# Altium PCB STM 32 F4 Robusta V1.PcbDoc (part 7 of 7)
Units mm, origin at the board's own origin, x right, y up, seen from the top; angles counter-clockwise.
Board outline 287.78 x 230 mm, 2 copper layers (Top Layer, Bottom Layer); 54 components, 96 nets, 355 pads, 16 vias.
Unrouted connection lines stored in the file: 3.
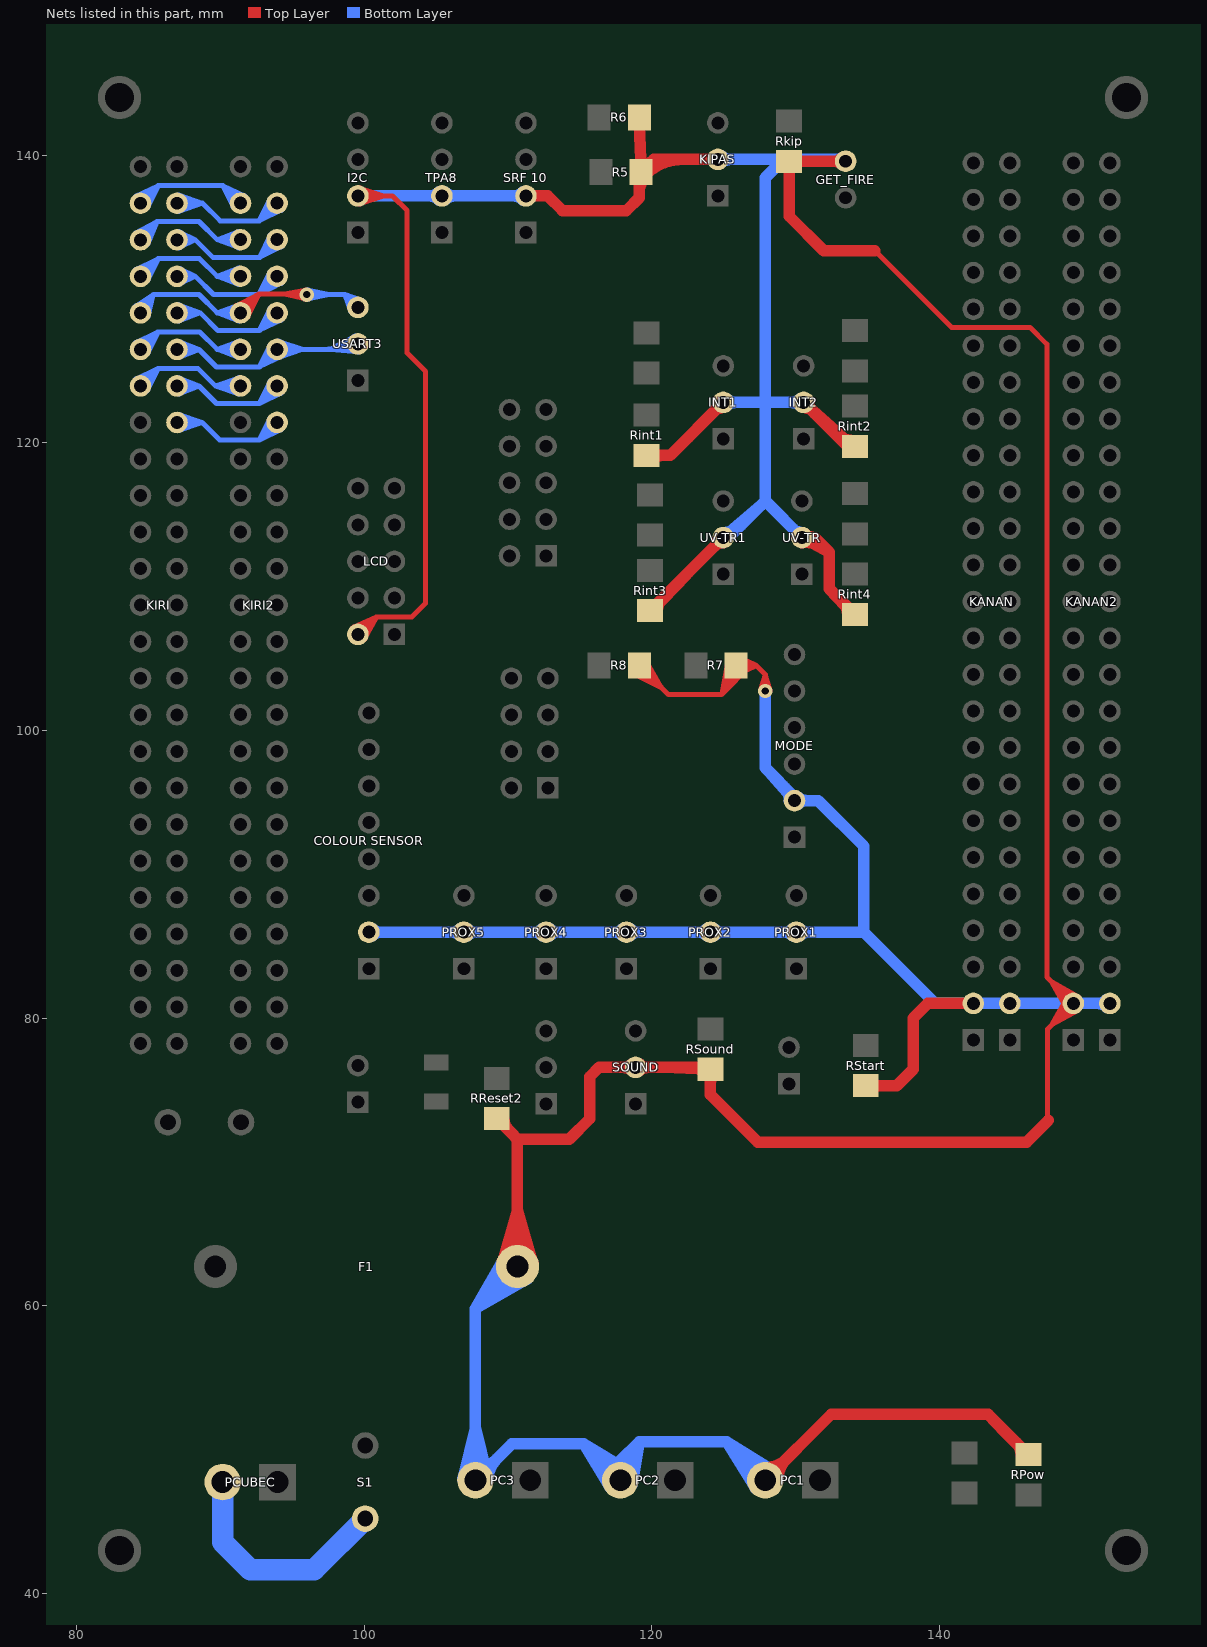
[diagram p7: the nets of this part, all layers, seen from the top]

## Via types
v1: diameter 1, hole 0.5, Top Layer to Bottom Layer, 13 vias
v2: diameter 0.8, hole 0.5, Top Layer to Bottom Layer, 3 vias

## Nets (pads, with @x,y where several pads share a name; then routed paths per layer and width w, separated by ;. In a path a pad name is that pad's centre, name@x,y a point inside that pad or via, vN(x,y) a via of type N, cw(c..) or ccw(c..) an arc to the next point about the centre after c; other vN are vias at no path point) (continued)
NetKIRI2_35: KIRI2.35 KIRI.35 | length 48.6
  Bottom Layer w0.35: KIRI.35@87.03,121.19 88.024,121.459 ; KIRI.35@87.03,121.634 88.024,121.365 ; KIRI.35@87.09,120.845 88.743,121.412 ; KIRI.35@87.09,121.979 88.743,121.412 ; KIRI.35@87.13,120.853 88.024,121.365 ; KIRI.35@87.13,121.971 88.024,121.459 ; KIRI.35@87.181,120.868 88.024,121.459 ; KIRI.35@87.181,121.956 88.024,121.365 ; KIRI.35@87.402,121.005 cw(c88.383,120.024) 88.383,121.412 cw(c88.383,122.8) KIRI.35@87.402,121.819 ; KIRI2.35@93.375,121.417 cw(c91.987,121.417) 92.968,120.435 cw(c93.95,119.454) KIRI2.35@93.95,120.842 ; KIRI2.35@93.434,121.67 93.256,120.656 ; KIRI2.35@93.459,121.717 93.189,120.723 ; KIRI2.35@93.482,121.75 92.725,120.192 ; KIRI2.35@93.768,121.55 93.256,120.656 ; KIRI2.35@94.083,121.235 93.189,120.723 ; KIRI2.35@94.203,120.901 93.189,120.723 ; KIRI2.35@94.25,120.926 93.256,120.656 ; KIRI2.35@94.283,120.949 92.725,120.192 ; KIRI.35@86.995,121.412 88.024,121.459 ; KIRI.35@86.995,121.412 88.024,121.365 ; KIRI.35@86.995,121.412 88.743,121.412 ; 88.024,121.365 87.009,121.187 88.743,121.412 ; 88.024,121.459 87.009,121.637 88.743,121.412 ; 88.743,121.412 89.963,120.192 92.725,120.192 ; 92.725,120.192 KIRI2.35@93.95,121.417 ; 92.725,120.192 93.781,121.565 93.189,120.723 ; 92.725,120.192 94.098,121.248 93.256,120.656 ; 92.725,120.192 KIRI2.35@93.95,121.417 ; 93.189,120.723 KIRI2.35@93.95,121.417 ; 93.256,120.656 KIRI2.35@93.95,121.417
NetKIRI2_37: KIRI2.37 KIRI.37 | length 47.7
  Bottom Layer w0.35: KIRI.37@87.009,123.727 88.024,123.905 ; KIRI.37@87.009,124.177 88.024,123.999 ; KIRI.37@87.012,123.728 88.519,123.952 ; KIRI.37@87.012,124.176 88.519,123.952 ; KIRI.37@87.03,123.73 88.024,123.999 ; KIRI.37@87.03,124.174 88.024,123.905 ; KIRI.37@87.103,123.387 88.519,123.952 ; KIRI.37@87.103,124.517 88.519,123.952 ; KIRI.37@87.13,123.393 88.024,123.905 ; KIRI.37@87.13,124.511 88.024,123.999 ; KIRI.37@87.181,123.408 88.024,123.999 ; KIRI.37@87.181,124.496 88.024,123.905 ; KIRI.37@87.402,123.545 cw(c88.383,122.564) 88.383,123.952 cw(c88.383,125.34) KIRI.37@87.402,124.359 ; KIRI2.37@93.375,123.957 cw(c91.987,123.957) 92.968,122.975 cw(c93.95,121.994) KIRI2.37@93.95,123.382 ; KIRI2.37@93.434,124.21 93.256,123.196 ; KIRI2.37@93.459,124.257 93.189,123.263 ; KIRI2.37@93.482,124.29 92.725,122.732 ; KIRI2.37@93.768,124.09 93.256,123.196 ; KIRI2.37@94.083,123.775 93.189,123.263 ; KIRI2.37@94.203,123.441 93.189,123.263 ; KIRI2.37@94.25,123.466 93.256,123.196 ; KIRI2.37@94.283,123.489 92.725,122.732 ; KIRI.37@86.995,123.952 88.024,123.999 ; KIRI.37@86.995,123.952 88.024,123.905 ; KIRI.37@86.995,123.952 88.519,123.952 ; 88.519,123.952 89.739,122.732 92.725,122.732 ; 92.725,122.732 KIRI2.37@93.95,123.957 ; 92.725,122.732 93.781,124.105 93.189,123.263 ; 92.725,122.732 94.098,123.788 93.256,123.196 ; 92.725,122.732 KIRI2.37@93.95,123.957 ; 93.189,123.263 KIRI2.37@93.95,123.957 ; 93.256,123.196 KIRI2.37@93.95,123.957
NetKIRI2_38: KIRI2.38 KIRI.38 | length 48.6
  Bottom Layer w0.35: KIRI.38@84.122,124.42 85.68,125.177 ; KIRI.38@84.155,124.443 85.149,124.713 ; KIRI.38@84.202,124.468 85.216,124.646 ; KIRI.38@84.322,124.134 85.216,124.646 ; KIRI.38@84.455,124.527 ccw(c84.455,125.915) 85.437,124.934 ccw(c86.418,123.952) KIRI.38@85.03,123.952 ; KIRI.38@84.637,123.819 85.149,124.713 ; KIRI.38@84.923,123.619 85.68,125.177 ; KIRI.38@84.946,123.652 85.216,124.646 ; KIRI.38@84.971,123.699 85.149,124.713 ; KIRI2.38@91.003,123.55 ccw(c90.022,122.569) 90.022,123.957 ccw(c90.022,125.345) KIRI2.38@91.003,124.364 ; KIRI2.38@91.224,123.413 90.381,124.004 ; KIRI2.38@91.224,124.501 90.381,123.91 ; KIRI2.38@91.275,123.398 90.381,123.91 ; KIRI2.38@91.275,124.516 90.381,124.004 ; KIRI2.38@91.316,123.39 89.657,123.957 ; KIRI2.38@91.316,124.524 89.657,123.957 ; KIRI2.38@91.375,123.735 90.381,124.004 ; KIRI2.38@91.375,124.179 90.381,123.91 ; KIRI.38@84.455,123.952 85.216,124.646 ; KIRI.38@84.455,123.952 85.149,124.713 ; KIRI.38@84.455,123.952 85.68,125.177 ; 85.149,124.713 84.306,124.121 85.68,125.177 ; 85.216,124.646 84.624,123.803 85.68,125.177 ; 85.68,125.177 88.437,125.177 89.657,123.957 ; 89.657,123.957 KIRI2.38@91.41,123.957 ; 89.657,123.957 91.396,124.182 90.381,124.004 ; 89.657,123.957 91.396,123.732 90.381,123.91 ; 89.657,123.957 KIRI2.38@91.41,123.957 ; 90.381,123.91 KIRI2.38@91.41,123.957 ; 90.381,124.004 KIRI2.38@91.41,123.957
NetKIRI2_39: KIRI2.39 KIRI.39 USART3.2 | length 99.2
  Bottom Layer w0.35: KIRI.39@87.009,126.267 88.024,126.445 ; KIRI.39@87.009,126.717 88.024,126.539 ; KIRI.39@87.012,126.268 88.519,126.492 ; KIRI.39@87.012,126.716 88.519,126.492 ; KIRI.39@87.03,126.27 88.024,126.539 ; KIRI.39@87.03,126.714 88.024,126.445 ; KIRI.39@87.103,125.927 88.519,126.492 ; KIRI.39@87.103,127.057 88.519,126.492 ; KIRI.39@87.13,125.933 88.024,126.445 ; KIRI.39@87.13,127.051 88.024,126.539 ; KIRI.39@87.181,125.948 88.024,126.539 ; KIRI.39@87.181,127.036 88.024,126.445 ; KIRI.39@87.402,126.085 cw(c88.383,125.104) 88.383,126.492 cw(c88.383,127.88) KIRI.39@87.402,126.899 ; KIRI2.39@93.375,126.497 cw(c91.987,126.497) 92.968,125.515 cw(c93.95,124.534) KIRI2.39@93.95,125.922 ; KIRI2.39@93.434,126.75 93.256,125.736 ; KIRI2.39@93.459,126.797 93.189,125.803 ; KIRI2.39@93.482,126.83 92.725,125.272 ; KIRI2.39@93.768,126.63 93.256,125.736 ; KIRI2.39@93.964,126.272 95.75,126.497 ; KIRI2.39@93.964,126.722 95.75,126.497 ; KIRI2.39@93.964,126.272 94.979,126.45 ; KIRI2.39@93.964,126.722 94.979,126.544 ; KIRI2.39@93.985,126.275 94.979,126.544 ; KIRI2.39@93.985,126.719 94.979,126.45 ; KIRI2.39@94.042,125.929 95.75,126.497 ; KIRI2.39@94.042,127.065 95.75,126.497 ; KIRI2.39@94.083,126.315 93.189,125.803 ; KIRI2.39@94.085,125.938 94.979,126.45 ; KIRI2.39@94.085,127.056 94.979,126.544 ; KIRI2.39@94.136,125.953 94.979,126.544 ; KIRI2.39@94.136,127.041 94.979,126.45 ; KIRI2.39@94.203,125.981 93.189,125.803 ; KIRI2.39@94.25,126.006 93.256,125.736 ; KIRI2.39@94.283,126.029 92.725,125.272 ; KIRI2.39@94.357,126.09 cw(c95.338,125.109) 95.338,126.497 cw(c95.338,127.885) KIRI2.39@94.357,126.904 ; 97.272,126.497 ccw(c97.272,129.169) USART3.2@99.161,127.28 ; 98.117,126.497 ccw(c98.117,128.324) USART3.2@99.409,127.032 ; USART3.2@99.192,126.497 KIRI2.39@93.95,126.497 ; USART3.2@99.246,127.349 98.59,126.559 ; USART3.2@99.369,127.413 97.964,126.588 ; USART3.2@99.376,127.415 97.646,126.497 ; USART3.2@99.476,127.078 98.59,126.559 ; USART3.2@99.512,127.091 97.646,126.497 ; USART3.2@99.513,127.091 97.964,126.588 ; USART3.2@99.567,126.298 97.964,126.588 ; USART3.2@99.583,126.298 98.59,126.559 ; USART3.2@99.592,126.649 97.964,126.588 ; USART3.2@99.594,126.299 97.646,126.497 ; USART3.2@99.598,126.65 97.646,126.497 ; USART3.2@99.613,126.653 98.59,126.559 ; KIRI.39@86.995,126.492 88.024,126.445 ; KIRI.39@86.995,126.492 88.024,126.539 ; KIRI.39@86.995,126.492 88.519,126.492 ; 88.519,126.492 89.739,125.272 92.725,125.272 ; 92.725,125.272 KIRI2.39@93.95,126.497 ; 92.725,125.272 93.781,126.645 93.189,125.803 ; 92.725,125.272 94.098,126.328 93.256,125.736 ; 92.725,125.272 KIRI2.39@93.95,126.497 ; 93.189,125.803 KIRI2.39@93.95,126.497 ; 93.256,125.736 KIRI2.39@93.95,126.497 ; KIRI2.39@93.95,126.497 94.979,126.45 ; KIRI2.39@93.95,126.497 94.979,126.544 ; 97.646,126.497 USART3.2@99.568,126.873 ; 97.964,126.588 USART3.2@99.568,126.873 ; 98.59,126.559 USART3.2@99.568,126.873
NetKIRI2_40: KIRI2.40 KIRI.40 | length 48
  Bottom Layer w0.35: KIRI.40@84.122,126.96 85.68,127.717 ; KIRI.40@84.155,126.983 85.149,127.253 ; KIRI.40@84.202,127.008 85.216,127.186 ; KIRI.40@84.322,126.674 85.216,127.186 ; KIRI.40@84.455,127.067 ccw(c84.455,128.455) 85.437,127.474 ccw(c86.418,126.492) KIRI.40@85.03,126.492 ; KIRI.40@84.637,126.359 85.149,127.253 ; KIRI.40@84.923,126.159 85.68,127.717 ; KIRI.40@84.946,126.192 85.216,127.186 ; KIRI.40@84.971,126.239 85.149,127.253 ; KIRI2.40@91.003,126.09 ccw(c90.022,125.109) 90.022,126.497 ccw(c90.022,127.885) KIRI2.40@91.003,126.904 ; KIRI2.40@91.224,125.953 90.381,126.544 ; KIRI2.40@91.224,127.041 90.381,126.45 ; KIRI2.40@91.275,125.938 90.381,126.45 ; KIRI2.40@91.275,127.056 90.381,126.544 ; KIRI2.40@91.308,125.931 89.784,126.497 ; KIRI2.40@91.308,127.063 89.784,126.497 ; KIRI2.40@91.375,126.275 90.381,126.544 ; KIRI2.40@91.375,126.719 90.381,126.45 ; KIRI2.40@91.394,126.273 89.784,126.497 ; KIRI2.40@91.394,126.721 89.784,126.497 ; KIRI2.40@91.396,126.272 90.381,126.45 ; KIRI2.40@91.396,126.722 90.381,126.544 ; KIRI.40@84.455,126.492 85.149,127.253 ; KIRI.40@84.455,126.492 85.216,127.186 ; KIRI.40@84.455,126.492 85.68,127.717 ; 85.149,127.253 84.306,126.661 85.68,127.717 ; 85.216,127.186 84.624,126.343 85.68,127.717 ; 85.68,127.717 88.564,127.717 89.784,126.497 ; 89.784,126.497 KIRI2.40@91.41,126.497 ; 89.784,126.497 KIRI2.40@91.41,126.497 ; 90.381,126.45 KIRI2.40@91.41,126.497 ; 90.381,126.544 KIRI2.40@91.41,126.497
NetKIRI2_41: KIRI2.41 KIRI.41 | length 48.1
  Bottom Layer w0.35: KIRI.41@87.009,128.807 88.024,128.985 ; KIRI.41@87.009,129.257 88.024,129.079 ; KIRI.41@87.011,128.808 88.616,129.032 ; KIRI.41@87.011,129.256 88.616,129.032 ; KIRI.41@87.03,128.81 88.024,129.079 ; KIRI.41@87.03,129.254 88.024,128.985 ; KIRI.41@87.097,128.466 88.616,129.032 ; KIRI.41@87.097,129.598 88.616,129.032 ; KIRI.41@87.13,128.473 88.024,128.985 ; KIRI.41@87.13,129.591 88.024,129.079 ; KIRI.41@87.181,128.488 88.024,129.079 ; KIRI.41@87.181,129.576 88.024,128.985 ; KIRI.41@87.402,128.625 cw(c88.383,127.644) 88.383,129.032 cw(c88.383,130.42) KIRI.41@87.402,129.439 ; KIRI2.41@93.375,129.037 cw(c91.987,129.037) 92.968,128.055 cw(c93.95,127.074) KIRI2.41@93.95,128.462 ; KIRI2.41@93.434,129.29 93.256,128.276 ; KIRI2.41@93.459,129.337 93.189,128.343 ; KIRI2.41@93.482,129.37 92.725,127.812 ; KIRI2.41@93.768,129.17 93.256,128.276 ; KIRI2.41@94.083,128.855 93.189,128.343 ; KIRI2.41@94.203,128.521 93.189,128.343 ; KIRI2.41@94.25,128.546 93.256,128.276 ; KIRI2.41@94.283,128.569 92.725,127.812 ; KIRI.41@86.995,129.032 88.024,129.079 ; KIRI.41@86.995,129.032 88.024,128.985 ; KIRI.41@86.995,129.032 88.616,129.032 ; 88.616,129.032 89.836,127.812 92.725,127.812 ; 92.725,127.812 KIRI2.41@93.95,129.037 ; 92.725,127.812 93.781,129.185 93.189,128.343 ; 92.725,127.812 94.098,128.868 93.256,128.276 ; 92.725,127.812 KIRI2.41@93.95,129.037 ; 93.189,128.343 KIRI2.41@93.95,129.037 ; 93.256,128.276 KIRI2.41@93.95,129.037
NetKIRI2_42: KIRI2.42 KIRI.42 USART3.3 | length 96.6
  Top Layer w0.35: KIRI2.42@91.071,129.502 92.725,130.352 ; KIRI2.42@91.11,129.528 92.104,129.798 ; KIRI2.42@91.156,129.553 92.171,129.731 ; KIRI2.42@91.277,129.219 92.171,129.731 ; KIRI2.42@91.41,129.612 ccw(c91.41,131) 92.392,130.019 ccw(c93.373,129.037) KIRI2.42@91.985,129.037 ; KIRI2.42@91.578,128.888 92.725,130.352 ; KIRI2.42@91.579,128.888 92.171,129.731 ; KIRI2.42@91.592,128.904 92.104,129.798 ; KIRI2.42@91.875,128.698 92.725,130.352 ; KIRI2.42@91.901,128.737 92.171,129.731 ; KIRI2.42@91.926,128.783 92.104,129.798 ; 95.107,130.352 cw(c95.107,129.397) v1@95.782,130.072 ; 95.348,130.352 ccw(c95.348,130.966) v1@95.782,130.532 ; v1@95.708,130.352 92.725,130.352 ; v1@95.867,130.011 95.507,130.373 ; v1@95.923,129.989 95.354,130.319 ; v1@95.94,130.619 95.354,130.319 ; v1@95.952,130.621 95.507,130.373 ; v1@95.968,129.98 94.457,130.352 ; v1@95.988,130.626 94.457,130.352 ; KIRI2.42@91.41,129.037 92.104,129.798 ; KIRI2.42@91.41,129.037 92.171,129.731 ; KIRI2.42@91.41,129.037 92.725,130.352 ; 92.104,129.798 91.261,129.206 92.725,130.352 ; 94.457,130.352 v1(96.012,130.302) ; 95.354,130.319 v1(96.012,130.302) ; 95.507,130.373 v1(96.012,130.302)
  Bottom Layer w0.35: KIRI.42@84.053,129.443 85.344,130.302 ; KIRI.42@84.124,129.502 85.039,129.795 ; KIRI.42@84.281,129.174 85.344,130.302 ; KIRI.42@84.294,129.189 85.039,129.795 ; KIRI.42@84.455,129.607 ccw(c84.455,130.075) 84.786,129.744 ; KIRI.42@84.648,128.917 85.344,130.302 ; KIRI.42@84.648,128.917 85.039,129.795 ; KIRI.42@84.674,129.082 cw(c85.484,129.268) 84.897,129.855 ; KIRI.42@84.979,128.795 85.344,130.302 ; KIRI.42@84.995,128.835 85.039,129.795 ; KIRI.42@85.015,129.16 cw(c86.212,129.434) 85.344,130.302 ; KIRI2.42@91.003,128.63 ccw(c90.022,127.649) 90.022,129.037 ccw(c90.022,130.425) KIRI2.42@91.003,129.444 ; KIRI2.42@91.224,128.493 90.381,129.084 ; KIRI2.42@91.224,129.581 90.381,128.99 ; KIRI2.42@91.275,128.478 90.381,128.99 ; KIRI2.42@91.275,129.596 90.381,129.084 ; KIRI2.42@91.308,128.471 89.784,129.037 ; KIRI2.42@91.308,129.603 89.784,129.037 ; KIRI2.42@91.375,128.815 90.381,129.084 ; KIRI2.42@91.375,129.259 90.381,128.99 ; KIRI2.42@91.394,128.813 89.784,129.037 ; KIRI2.42@91.394,129.261 89.784,129.037 ; KIRI2.42@91.396,128.812 90.381,128.99 ; KIRI2.42@91.396,129.262 90.381,129.084 ; v1@96.046,129.979 97.562,130.302 v1@96.046,130.625 ; v1@96.088,129.986 96.594,130.275 ; v1@96.088,130.618 96.594,130.329 ; v1@96.117,129.994 96.594,130.329 ; v1@96.117,130.61 96.594,130.275 ; v1@96.242,130.072 cw(c96.797,129.517) 96.797,130.302 cw(c96.797,131.087) v1@96.242,130.532 ; USART3.3@98.995,129.455 ccw(c97.911,129.533) 98.679,130.302 ; USART3.3@99.079,129.11 98.679,130.302 ; USART3.3@99.395,129.269 98.679,130.302 ; USART3.3@99.526,129.986 cw(c99.448,131.07) 98.679,130.302 ; USART3.3@99.568,129.413 98.679,130.302 ; USART3.3@99.712,129.586 98.679,130.302 ; USART3.3@99.871,129.902 98.679,130.302 ; KIRI.42@84.455,129.032 85.039,129.795 ; KIRI.42@84.455,129.032 85.344,130.302 ; KIRI.42@84.455,129.032 84.455,129.413 85.344,130.302 ; 85.344,130.302 88.519,130.302 89.784,129.037 ; 89.784,129.037 KIRI2.42@91.41,129.037 ; 89.784,129.037 KIRI2.42@91.41,129.037 ; 90.381,128.99 KIRI2.42@91.41,129.037 ; 90.381,129.084 KIRI2.42@91.41,129.037 ; v1(96.012,130.302) 96.594,130.275 ; v1(96.012,130.302) 96.594,130.329 ; v1(96.012,130.302) 98.679,130.302
NetKIRI2_43: KIRI2.43 KIRI.43 | length 45.6
  Bottom Layer w0.35: KIRI.43@87.008,131.347 87.907,131.513 ; KIRI.43@87.008,131.797 87.907,131.631 ; KIRI.43@87.015,131.348 88.265,131.572 ; KIRI.43@87.015,131.796 88.265,131.572 ; KIRI.43@87.037,131.351 87.907,131.631 ; KIRI.43@87.037,131.793 87.907,131.513 ; KIRI.43@87.125,131.012 88.265,131.572 ; KIRI.43@87.125,132.132 88.265,131.572 ; KIRI.43@87.14,131.016 87.907,131.513 ; KIRI.43@87.14,132.128 87.907,131.631 ; KIRI.43@87.211,131.039 87.907,131.631 ; KIRI.43@87.211,132.105 87.907,131.513 ; KIRI.43@87.427,131.193 cw(c88.265,130.457) 88.265,131.572 ; KIRI.43@87.427,131.951 ccw(c88.265,132.687) 88.265,131.572 ; KIRI2.43@93.375,131.577 cw(c91.987,131.577) 92.968,130.595 cw(c93.95,129.614) KIRI2.43@93.95,131.002 ; KIRI2.43@93.434,131.83 93.256,130.816 ; KIRI2.43@93.459,131.877 93.189,130.883 ; KIRI2.43@93.484,131.914 92.675,130.302 ; KIRI2.43@93.768,131.71 93.256,130.816 ; KIRI2.43@93.781,131.726 93.189,130.883 ; KIRI2.43@93.781,131.726 92.675,130.302 ; KIRI2.43@94.083,131.395 93.189,130.883 ; KIRI2.43@94.099,131.408 93.256,130.816 ; KIRI2.43@94.099,131.408 92.675,130.302 ; KIRI2.43@94.203,131.061 93.189,130.883 ; KIRI2.43@94.25,131.086 93.256,130.816 ; KIRI2.43@94.287,131.111 92.675,130.302 ; KIRI.43@86.995,131.572 87.907,131.631 ; KIRI.43@86.995,131.572 87.907,131.513 ; KIRI.43@86.995,131.572 88.265,131.572 ; 88.265,131.572 89.535,130.302 92.675,130.302 ; 92.675,130.302 KIRI2.43@93.95,131.577 ; 92.675,130.302 KIRI2.43@93.95,131.577 ; 93.189,130.883 KIRI2.43@93.95,131.577 ; 93.256,130.816 KIRI2.43@93.95,131.577
NetKIRI2_44: KIRI2.44 KIRI.44 | length 48
  Bottom Layer w0.35: KIRI.44@84.122,132.04 85.68,132.797 ; KIRI.44@84.155,132.063 85.149,132.333 ; KIRI.44@84.202,132.088 85.216,132.266 ; KIRI.44@84.322,131.754 85.216,132.266 ; KIRI.44@84.455,132.147 ccw(c84.455,133.535) 85.437,132.554 ccw(c86.418,131.572) KIRI.44@85.03,131.572 ; KIRI.44@84.637,131.439 85.149,132.333 ; KIRI.44@84.923,131.239 85.68,132.797 ; KIRI.44@84.946,131.272 85.216,132.266 ; KIRI.44@84.971,131.319 85.149,132.333 ; KIRI2.44@91.003,131.17 ccw(c90.022,130.189) 90.022,131.577 ccw(c90.022,132.965) KIRI2.44@91.003,131.984 ; KIRI2.44@91.224,131.033 90.381,131.624 ; KIRI2.44@91.224,132.121 90.381,131.53 ; KIRI2.44@91.275,131.018 90.381,131.53 ; KIRI2.44@91.275,132.136 90.381,131.624 ; KIRI2.44@91.308,131.011 89.784,131.577 ; KIRI2.44@91.308,132.143 89.784,131.577 ; KIRI2.44@91.375,131.355 90.381,131.624 ; KIRI2.44@91.375,131.799 90.381,131.53 ; KIRI2.44@91.394,131.353 89.784,131.577 ; KIRI2.44@91.394,131.801 89.784,131.577 ; KIRI2.44@91.396,131.352 90.381,131.53 ; KIRI2.44@91.396,131.802 90.381,131.624 ; KIRI.44@84.455,131.572 85.149,132.333 ; KIRI.44@84.455,131.572 85.216,132.266 ; KIRI.44@84.455,131.572 85.68,132.797 ; 85.149,132.333 84.306,131.741 85.68,132.797 ; 85.216,132.266 84.624,131.423 85.68,132.797 ; 85.68,132.797 88.564,132.797 89.784,131.577 ; 89.784,131.577 KIRI2.44@91.41,131.577 ; 89.784,131.577 KIRI2.44@91.41,131.577 ; 90.381,131.53 KIRI2.44@91.41,131.577 ; 90.381,131.624 KIRI2.44@91.41,131.577
NetKIRI2_45: KIRI2.45 KIRI.45 | length 40.1
  Bottom Layer w0.35: KIRI.45@87.008,133.887 87.907,134.053 ; KIRI.45@87.008,134.337 87.907,134.171 ; KIRI.45@87.015,133.888 88.265,134.112 ; KIRI.45@87.015,134.336 88.265,134.112 ; KIRI.45@87.037,133.891 87.907,134.171 ; KIRI.45@87.037,134.333 87.907,134.053 ; KIRI.45@87.125,133.552 88.265,134.112 ; KIRI.45@87.125,134.672 88.265,134.112 ; KIRI.45@87.14,133.556 87.907,134.053 ; KIRI.45@87.14,134.668 87.907,134.171 ; KIRI.45@87.211,133.579 87.907,134.171 ; KIRI.45@87.211,134.645 87.907,134.053 ; KIRI.45@87.427,133.733 cw(c88.265,132.997) 88.265,134.112 ; KIRI.45@87.427,134.491 ccw(c88.265,135.227) 88.265,134.112 ; 92.944,133.076 ccw(c91.902,134.117) KIRI2.45@93.375,134.117 ; 93.028,133.16 cw(c93.95,132.238) KIRI2.45@93.95,133.542 ; KIRI2.45@93.456,134.411 93.178,133.381 ; KIRI2.45@93.476,134.442 92.76,132.892 ; KIRI2.45@93.95,134.082 92.76,132.892 ; KIRI2.45@94.087,133.939 93.178,133.381 ; KIRI2.45@94.101,133.95 92.76,132.892 ; KIRI2.45@94.22,133.609 93.178,133.381 ; KIRI2.45@94.289,133.653 92.76,132.892 ; KIRI.45@86.995,134.112 87.907,134.171 ; KIRI.45@86.995,134.112 87.907,134.053 ; KIRI.45@86.995,134.112 88.265,134.112 ; 88.265,134.112 89.485,132.892 92.76,132.892 ; 92.76,132.892 KIRI2.45@93.95,134.117 93.178,133.381 ; 92.76,132.892 93.779,134.263 93.178,133.381
NetKIRI2_46: KIRI2.46 KIRI.46 | length 48.1
  Bottom Layer w0.35: KIRI.46@84.098,134.563 85.598,135.382 ; KIRI.46@84.102,134.566 85.526,135.31 ; KIRI.46@84.298,134.273 85.598,135.382 ; KIRI.46@84.298,134.273 85.526,135.31 ; KIRI.46@84.455,134.687 ccw(c84.455,135.769) 85.22,135.004 ; KIRI.46@84.632,133.973 85.598,135.382 ; KIRI.46@84.633,133.974 85.526,135.31 ; KIRI.46@84.68,134.112 cw(c85.53,134.112) 84.929,134.713 ; KIRI.46@84.941,133.805 85.598,135.382 ; KIRI.46@84.945,133.812 85.526,135.31 ; KIRI.46@85.03,134.112 cw(c86.725,134.112) 85.526,135.31 ; KIRI2.46@91.003,133.71 ccw(c90.022,132.729) 90.022,134.117 ccw(c90.022,135.505) KIRI2.46@91.003,134.524 ; KIRI2.46@91.224,133.573 90.381,134.164 ; KIRI2.46@91.224,134.661 90.381,134.07 ; KIRI2.46@91.275,133.558 90.381,134.07 ; KIRI2.46@91.275,134.676 90.381,134.164 ; KIRI2.46@91.308,133.551 89.784,134.117 ; KIRI2.46@91.308,134.683 89.784,134.117 ; KIRI2.46@91.375,133.895 90.381,134.164 ; KIRI2.46@91.375,134.339 90.381,134.07 ; KIRI2.46@91.394,133.893 89.784,134.117 ; KIRI2.46@91.394,134.341 89.784,134.117 ; KIRI2.46@91.396,133.892 90.381,134.07 ; KIRI2.46@91.396,134.342 90.381,134.164 ; KIRI.46@84.455,134.112 85.526,135.31 ; KIRI.46@84.455,134.112 85.598,135.382 ; KIRI.46@84.455,134.112 84.455,134.239 85.598,135.382 ; 85.598,135.382 88.519,135.382 89.784,134.117 ; 89.784,134.117 KIRI2.46@91.41,134.117 ; 89.784,134.117 KIRI2.46@91.41,134.117 ; 90.381,134.07 KIRI2.46@91.41,134.117 ; 90.381,134.164 KIRI2.46@91.41,134.117
NetKIRI2_47: KIRI2.47 KIRI.47 | length 48.8
  Bottom Layer w0.35: KIRI.47@87.03,136.43 88.024,136.699 ; KIRI.47@87.03,136.874 88.024,136.605 ; KIRI.47@87.088,136.085 88.773,136.652 ; KIRI.47@87.088,137.219 88.773,136.652 ; KIRI.47@87.13,136.093 88.024,136.605 ; KIRI.47@87.13,137.211 88.024,136.699 ; KIRI.47@87.181,136.108 88.024,136.699 ; KIRI.47@87.181,137.196 88.024,136.605 ; KIRI.47@87.402,136.245 cw(c88.383,135.264) 88.383,136.652 cw(c88.383,138.04) KIRI.47@87.402,137.059 ; KIRI2.47@93.375,136.657 cw(c91.987,136.657) 92.968,135.675 cw(c93.95,134.694) KIRI2.47@93.95,136.082 ; KIRI2.47@93.434,136.91 93.256,135.896 ; KIRI2.47@93.459,136.957 93.189,135.963 ; KIRI2.47@93.482,136.99 92.725,135.432 ; KIRI2.47@93.768,136.79 93.256,135.896 ; KIRI2.47@94.083,136.475 93.189,135.963 ; KIRI2.47@94.203,136.141 93.189,135.963 ; KIRI2.47@94.25,136.166 93.256,135.896 ; KIRI2.47@94.283,136.189 92.725,135.432 ; KIRI.47@86.995,136.652 88.024,136.605 ; KIRI.47@86.995,136.652 88.024,136.699 ; KIRI.47@86.995,136.652 88.773,136.652 ; 88.024,136.605 87.009,136.427 88.773,136.652 ; 88.024,136.699 87.009,136.877 88.773,136.652 ; 88.773,136.652 89.993,135.432 92.725,135.432 ; 92.725,135.432 KIRI2.47@93.95,136.657 ; 92.725,135.432 93.781,136.805 93.189,135.963 ; 92.725,135.432 94.098,136.488 93.256,135.896 ; 92.725,135.432 KIRI2.47@93.95,136.657 ; 93.189,135.963 KIRI2.47@93.95,136.657 ; 93.256,135.896 KIRI2.47@93.95,136.657
  Bottom Layer w0.55: KIRI.47@86.995,136.525 KIRI.47@86.995,136.652
NetKIRI2_48: KIRI2.48 KIRI.48 | length 48.5
  Bottom Layer w0.35: KIRI.48@84.122,137.12 85.68,137.877 ; KIRI.48@84.155,137.143 85.149,137.413 ; KIRI.48@84.202,137.168 85.216,137.346 ; KIRI.48@84.322,136.834 85.216,137.346 ; KIRI.48@84.455,137.227 ccw(c84.455,138.615) 85.437,137.634 ccw(c86.418,136.652) KIRI.48@85.03,136.652 ; KIRI.48@84.637,136.519 85.149,137.413 ; KIRI.48@84.923,136.319 85.68,137.877 ; KIRI.48@84.946,136.352 85.216,137.346 ; KIRI.48@84.971,136.399 85.149,137.413 ; KIRI2.48@90.835,136.657 ccw(c89.447,136.657) 90.428,137.639 ccw(c91.41,138.62) KIRI2.48@91.41,137.232 ; KIRI2.48@90.894,136.403 90.716,137.418 ; KIRI2.48@90.919,136.357 90.649,137.351 ; KIRI2.48@90.941,136.324 90.19,137.877 ; KIRI2.48@91.228,136.524 90.716,137.418 ; KIRI2.48@91.543,136.839 90.649,137.351 ; KIRI2.48@91.663,137.173 90.649,137.351 ; KIRI2.48@91.71,137.148 90.716,137.418 ; KIRI2.48@91.743,137.126 90.19,137.877 ; KIRI.48@84.455,136.652 85.149,137.413 ; KIRI.48@84.455,136.652 85.216,137.346 ; KIRI.48@84.455,136.652 85.68,137.877 ; 85.149,137.413 84.306,136.821 85.68,137.877 ; 85.216,137.346 84.624,136.503 85.68,137.877 ; 85.68,137.877 90.19,137.877 ; 90.19,137.877 KIRI2.48@91.41,136.657 ; 90.19,137.877 91.558,136.826 90.716,137.418 ; 90.19,137.877 91.241,136.509 90.649,137.351 ; 90.19,137.877 KIRI2.48@91.41,136.657 ; 90.649,137.351 KIRI2.48@91.41,136.657 ; 90.716,137.418 KIRI2.48@91.41,136.657
UBEC: PCUBEC.1 S1.1 | length 20.6
  Bottom Layer w1.5: S1.1@100.076,45.212 96.52,41.656 92.075,41.656 90.17,43.561 ; 90.17,43.561 PCUBEC.1@90.17,47.752 90.17,43.561
VCC: "COLOUR SENSOR.2" "SRF 10.2" F1.2 GET_FIRE.1 I2C.2 INT1.2 INT2.2 KANAN2.3 KANAN2.4 KANAN.3 KANAN.4 KIPAS.2 LCD.2 MODE.2 PC1.1 PC2.1 PC3.1 PROX1.2 PROX2.2 PROX3.2 PROX4.2 PROX5.2 R5.2 R6.2 R7.2 R8.2 Rint1.1 Rint2.1 Rint3.1 Rint4.1 Rkip.1 RPow.1 RReset2.2 RSound.1 RStart.1 SOUND.2 TPA8.2 UV-TR1.2 UV-TR.2 | length 808.1
  Top Layer w0.35: LCD.2@99.246,107.156 100.867,107.905 ; LCD.2@99.28,107.178 100.351,107.465 ; LCD.2@99.424,106.853 100.867,107.905 ; LCD.2@99.426,106.854 100.351,107.465 ; LCD.2@99.568,107.255 ccw(c99.568,108.822) 100.676,107.714 ; I2C.2@99.603,136.938 100.597,137.207 ; I2C.2@99.603,137.382 100.597,137.113 ; LCD.2@99.642,106.68 100.867,107.905 ; I2C.2@99.66,136.592 101.368,137.16 ; I2C.2@99.66,137.728 101.368,137.16 ; I2C.2@99.703,136.601 100.597,137.113 ; I2C.2@99.703,137.719 100.597,137.207 ; LCD.2@99.732,106.526 100.867,107.905 ; LCD.2@99.743,106.538 100.351,107.465 ; I2C.2@99.754,136.616 100.597,137.207 ; I2C.2@99.754,137.704 100.597,137.113 ; I2C.2@99.975,136.753 cw(c100.956,135.772) 100.956,137.16 cw(c100.956,138.548) I2C.2@99.975,137.567 ; LCD.2@100.025,106.331 100.867,107.905 ; LCD.2@100.066,106.393 100.351,107.465 ; LCD.2@100.143,106.68 cw(c101.353,106.68) 100.497,107.535 ; R8.2@118.774,103.906 120.671,102.979 ; R8.2@118.819,103.878 120.004,103.562 ; R8.2@118.955,104.208 120.671,102.979 ; R8.2@118.96,104.204 120.004,103.562 ; R8.2@119.129,103.796 cw(c119.129,102.046) 120.367,103.283 ; R8.2@119.129,104.146 cw(c119.129,103.241) R8.2@119.769,103.881 ; R8.2@119.129,104.521 121.161,102.489 124.841,102.489 ; R8.2@119.33,104.609 120.671,102.979 ; R8.2@119.342,104.594 120.004,103.562 ; R8.2@119.619,104.809 120.671,102.979 ; R8.2@119.666,104.741 120.004,103.562 ; R8.2@119.754,104.421 ccw(c121.021,104.421) 120.125,103.525 ; R7.2@125.238,104.355 125.632,103.6 ; 125.247,102.895 ccw(c124.239,103.904) R7.2@125.598,104.337 ; R7.2@125.249,104.553 125.306,103.34 ; R7.2@125.265,104.231 cw(c123.622,103.708) 124.841,102.489 ; R7.2@125.268,104.622 124.892,102.54 ; R7.2@125.587,104.451 125.632,103.6 ; R7.2@125.603,104.518 125.306,103.34 ; R7.2@125.608,104.531 124.892,102.54 ; R7.2@125.634,103.838 cw(c125.506,103.508) 125.86,103.508 ; 125.654,103.302 ccw(c124.855,104.101) R7.2@125.931,104.444 ; R7.2@125.86,104.621 126.864,104.584 ; R7.2@125.887,104.247 127.254,104.521 ; R7.2@125.888,104.347 126.864,104.584 ; R7.2@125.888,104.695 126.864,104.458 ; R7.2@125.887,104.795 127.254,104.521 ; R7.2@125.908,104.15 126.864,104.458 ; R7.2@125.908,104.892 126.864,104.584 ; R7.2@126,103.912 127.254,104.521 ; R7.2@126,105.13 127.254,104.521 ; R7.2@126.032,104.02 126.864,104.584 ; R7.2@126.032,105.022 126.864,104.458 ; R7.2@126.076,103.835 126.864,104.458 ; R7.2@126.076,105.207 126.864,104.584 ; R7.2@126.086,103.838 ccw(c126.214,103.508) 125.86,103.508 ; R7.2@126.089,104.269 125.306,103.34 ; R7.2@126.096,104.28 124.892,102.54 ; R7.2@126.11,104.306 125.632,103.6 ; R7.2@126.324,104.003 125.306,103.34 ; R7.2@126.327,104.105 cw(c127.254,103.279) 127.254,104.521 ; R7.2@126.327,104.937 ccw(c127.254,105.763) 127.254,104.521 ; R7.2@126.359,104.045 125.632,103.6 ; R7.2@126.367,104.056 124.892,102.54 ; v1@127.567,102.789 127.889,103.886 ; v1@127.573,102.819 127.862,103.325 ; v1@127.581,102.848 127.916,103.325 ; v1@127.659,102.973 ccw(c127.104,103.528) 127.889,103.528 ccw(c128.674,103.528) v1@128.119,102.973 ; v1@128.197,102.848 127.862,103.325 ; v1@128.205,102.819 127.916,103.325 ; v1@128.211,102.789 127.889,103.886 ; 135.509,133.35 140.843,128.016 146.304,128.016 147.462,126.858 147.462,82.869 KANAN2.4@149.305,81.026 ; 147.511,72.962 147.511,79.231 KANAN2.4@149.305,81.026 ; KANAN2.4@148.847,80.679 147.813,82.518 ; KANAN2.4@148.847,81.373 147.813,79.534 ; KANAN2.4@149.138,80.876 147.813,82.518 ; KANAN2.4@149.138,81.176 147.813,79.534 ; KANAN2.4@149.455,80.859 147.813,79.534 ; KANAN2.4@149.455,81.193 147.813,82.518 ; KANAN2.4@149.652,80.568 147.813,79.534 ; KANAN2.4@149.652,81.484 147.813,82.518 ; I2C.2@99.568,137.16 100.597,137.207 ; I2C.2@99.568,137.16 100.597,137.113 ; I2C.2@99.568,137.16 101.981,137.16 102.997,136.144 102.997,126.238 104.267,124.968 104.267,108.839 103.333,107.905 100.867,107.905 ; 100.351,107.465 LCD.2@99.568,106.68 100.867,107.905 ; 100.597,137.113 99.582,136.935 101.368,137.16 ; 100.597,137.207 99.582,137.385 101.368,137.16 ; 120.004,103.562 119.129,104.421 120.671,102.979 ; 124.841,102.489 125.86,103.508 ; 124.892,102.54 R7.2@125.86,104.421 ; 125.306,103.34 R7.2@125.86,104.421 ; 125.632,103.6 R7.2@125.86,104.421 ; 125.86,103.508 R7.2@125.86,104.421 ; 125.86,103.508 125.588,104.38 125.86,103.508 ; 125.86,103.508 126.132,104.38 125.86,103.508 ; 125.86,103.508 125.273,104.207 125.86,103.508 ; 125.86,103.508 126.447,104.207 125.86,103.508 ; 125.86,103.508 R7.2@125.86,104.421 ; 125.86,103.508 R7.2@125.86,104.521 127.254,104.521 ; R7.2@125.86,104.421 126.864,104.458 ; 127.254,104.521 127.889,103.886 ; 127.862,103.325 v1(127.889,102.743) ; v1(127.889,102.743) 127.916,103.325 ; v1(127.889,102.743) 127.889,103.886 ; 147.813,79.534 KANAN2.4@149.305,81.026 ; 147.813,82.518 KANAN2.4@149.305,81.026
  Top Layer w0.8: LCD.2@99.568,106.68 LCD.2@99.642,106.68 ; RReset2.2@109.22,73.022 110.662,71.58 ; RReset2.2@109.32,73.022 110.662,71.58 ; F1.2@109.573,62.893 110.662,66.638 F1.2@111.751,62.893 ; F1.2@109.593,62.996 110.572,64.706 ; F1.2@109.621,63.093 110.752,64.706 ; RReset2.2@109.72,73.022 ccw(c110.927,73.022) 110.074,72.168 ; F1.2@109.884,63.516 ccw(c108.006,65.394) 110.662,65.394 ccw(c113.318,65.394) F1.2@111.44,63.516 ; 111.252,137.16 112.776,137.16 113.792,136.144 118.237,136.144 119.129,137.036 119.129,138.938 R5.2@119.256,138.811 120.145,139.7 ; F1.2@111.703,63.093 110.572,64.706 ; F1.2@111.731,62.996 110.752,64.706 ; SOUND.2@118.625,76.334 ccw(c118.027,75.736) 118.027,76.581 ccw(c118.027,77.426) SOUND.2@118.625,76.828 ; SOUND.2@119.119,76.334 cw(c119.717,75.736) 119.717,76.581 cw(c119.717,77.426) SOUND.2@119.119,76.828 ; 119.129,137.439 cw(c120.528,137.439) R5.2@119.539,138.428 ; R6.2@119.129,142.117 119.256,138.911 120.145,139.7 ; R5.2@119.539,138.628 cw(c122.126,136.041) 122.126,139.7 ; Rint1.1@119.634,119.123 121.282,119.123 ; Rint1.1@119.734,119.123 121.282,119.123 ; Rint3.1@119.888,108.331 UV-TR1.2@124.968,113.411 122.521,110.964 ; Rint3.1@119.988,108.328 122.383,110.826 ; Rint1.1@120.017,118.84 cw(c120.7,118.157) 120.7,119.123 cw(c120.7,120.089) Rint1.1@120.017,119.406 ; Rint3.1@120.388,108.328 cw(c121.602,108.328) 120.744,109.187 ; 120.772,76.581 123.979,76.451 123.064,76.533 ; 122.521,120.362 INT1.2@124.968,122.809 121.282,119.123 ; 122.699,76.581 cw(c122.699,75.171) RSound.1@123.696,76.168 ; RSound.1@123.796,76.168 cw(c123.113,75.485) 124.079,75.485 cw(c125.045,75.485) RSound.1@124.362,76.168 ; RSound.1@123.949,76.581 SOUND.2@118.872,76.581 116.332,76.581 115.697,75.946 115.697,73.025 114.252,71.58 110.662,71.58 ; RSound.1@124.079,76.451 124.079,74.676 127.381,71.374 146.05,71.374 147.574,72.898 ; KIPAS.2@124.587,139.7 120.145,139.7 ; UV-TR1.2@124.618,113.411 cw(c123.773,113.411) 124.371,112.814 cw(c124.968,112.216) UV-TR1.2@124.968,113.061 ; INT1.2@124.618,122.809 cw(c123.773,122.809) 124.371,122.212 cw(c124.968,121.614) INT1.2@124.968,122.459 ; PC1.1@127.889,47.879 132.461,52.451 143.386,52.451 RPow.1@146.177,49.66 ; PC1.1@127.889,48.749 ccw(c127.889,50.849) 129.374,49.364 ccw(c130.859,47.879) PC1.1@128.759,47.879 ; UV-TR.2@130.464,113.063 cw(c130.694,110.755) 132.334,112.395 ; INT2.2@130.556,122.459 cw(c130.556,121.614) 131.153,122.212 cw(c131.751,122.809) INT2.2@130.906,122.809 ; UV-TR.2@130.677,113.164 cw(c131.274,112.566) 131.274,113.411 cw(c131.274,114.256) UV-TR.2@130.677,113.658 ; 131.297,122.068 134.012,119.758 133.04,120.418 ; 131.648,112.869 UV-TR.2@130.429,113.411 ; 132.625,139.57 ccw(c132.625,140.425) GET_FIRE.1@133.23,139.82 ; 132.638,120.727 ccw(c134.012,122.101) Rint2.1@134.012,120.158 ; 132.639,139.57 cw(c132.639,138.735) GET_FIRE.1@133.23,139.326 ; 133.093,120.54 INT2.2@130.556,122.809 Rint2.1@133.607,119.758 ; 133.258,108.928 cw(c132.405,108.074) Rint4.1@133.612,108.074 ; GET_FIRE.1@133.474,139.57 Rkip.1@129.54,139.57 129.54,135.763 131.953,133.35 135.509,133.35 ; Rint4.1@134.012,108.074 132.334,109.852 ; Rint4.1@134.112,108.074 132.334,109.852 ; RStart.1@134.974,75.308 137.033,75.308 138.176,76.451 138.176,80.01 139.192,81.026 KANAN.4@142.35,81.026 ; RStart.1@135.257,75.025 cw(c135.94,74.342) 135.94,75.308 cw(c135.94,76.274) RStart.1@135.257,75.591 ; 143.68,52.157 RPow.1@146.077,49.66 ; 145.323,50.514 cw(c144.47,49.66) RPow.1@145.677,49.66 ; 110.572,64.706 F1.2@110.662,62.738 ; F1.2@110.662,62.738 110.752,64.706 ; F1.2@110.662,62.738 110.662,71.58 ; UV-TR.2@130.429,113.411 131.318,113.411 ; UV-TR.2@130.429,113.411 132.334,112.395 ; UV-TR.2@130.429,113.411 131.318,113.411 ; 131.318,113.411 132.334,112.395 ; 132.334,109.852 132.334,112.395
  Bottom Layer w0.8: I2C.2@99.568,137.16 TPA8.2@105.41,137.16 111.252,137.16 108.102,137.16 ; I2C.2@99.815,136.913 cw(c100.413,136.315) 100.413,137.16 cw(c100.413,138.005) I2C.2@99.815,137.407 ; 100.33,85.979 PROX5.2@106.934,85.979 PROX4.2@112.649,85.979 PROX3.2@118.237,85.979 PROX2.2@124.079,85.979 PROX1.2@130.048,85.979 134.747,85.979 ; 100.577,85.732 cw(c101.175,85.134) 101.175,85.979 cw(c101.175,86.824) 100.577,86.226 ; TPA8.2@105.163,136.913 ccw(c104.565,136.315) 104.565,137.16 ccw(c104.565,138.005) TPA8.2@105.163,137.407 ; TPA8.2@105.657,136.913 cw(c106.255,136.315) 106.255,137.16 cw(c106.255,138.005) TPA8.2@105.657,137.407 ; PROX5.2@106.687,85.732 ccw(c106.089,85.134) 106.089,85.979 ccw(c106.089,86.824) PROX5.2@106.687,86.226 ; PC3.1@106.874,47.982 107.738,51.549 PC3.1@108.602,47.982 ; PC3.1@106.893,48.083 107.667,49.436 ; PC3.1@106.915,48.16 107.81,49.436 ; PC3.1@107.123,48.494 ccw(c105.638,49.979) 107.738,49.979 ccw(c109.839,49.979) PC3.1@108.353,48.494 ; PROX5.2@107.181,85.732 cw(c107.779,85.134) 107.779,85.979 cw(c107.779,86.824) PROX5.2@107.181,86.226 ; PC3.1@107.738,48.749 ccw(c107.738,50.849) 109.223,49.364 ccw(c110.709,47.879) PC3.1@108.608,47.879 ; PC3.1@108.562,48.16 107.667,49.436 ; PC3.1@108.584,48.083 107.81,49.436 ; F1.2@109.562,62.738 cw(c106.906,62.738) 108.784,60.86 cw(c110.662,58.982) F1.2@110.662,61.638 ; F1.2@109.788,63.405 107.738,59.814 ; F1.2@110.662,62.738 107.738,59.814 ; 111.005,136.913 ccw(c110.407,136.315) 110.407,137.16 ccw(c110.407,138.005) 111.005,137.407 ; F1.2@111.329,61.864 107.738,59.814 ; PROX4.2@112.402,85.732 ccw(c111.804,85.134) 111.804,85.979 ccw(c111.804,86.824) PROX4.2@112.402,86.226 ; PROX4.2@112.896,85.732 cw(c113.494,85.134) 113.494,85.979 cw(c113.494,86.824) PROX4.2@112.896,86.226 ; PC2.1@116.944,47.879 ccw(c114.843,47.879) 116.328,49.364 ccw(c117.814,50.849) PC2.1@117.814,48.749 ; PC2.1@116.99,48.158 117.814,49.234 ; PC2.1@117.098,48.373 119.126,50.546 ; PC2.1@117.129,47.343 115.274,50.419 ; PC2.1@117.159,48.453 118.506,49.328 ; PC2.1@117.879,47.904 cw(c119.43,48.5) 118.255,49.675 ; PROX3.2@117.99,85.732 ccw(c117.392,85.134) 117.392,85.979 ccw(c117.392,86.824) PROX3.2@117.99,86.226 ; PC2.1@118.35,48.564 115.274,50.419 ; PROX3.2@118.484,85.732 cw(c119.082,85.134) 119.082,85.979 cw(c119.082,86.824) PROX3.2@118.484,86.226 ; PC2.1@118.626,48.191 cw(c120.688,48.984) 119.126,50.546 ; PC2.1@118.638,48.158 117.814,49.234 ; PC2.1@118.642,47.613 119.126,50.546 ; PC2.1@118.671,47.731 118.506,49.328 ; PROX2.2@123.832,85.732 ccw(c123.234,85.134) 123.234,85.979 ccw(c123.234,86.824) PROX2.2@123.832,86.226 ; PROX2.2@124.326,85.732 cw(c124.924,85.134) 124.924,85.979 cw(c124.924,86.824) PROX2.2@124.326,86.226 ; KIPAS.2@124.587,139.7 129.159,139.7 ; KIPAS.2@124.834,139.453 cw(c125.432,138.855) 125.432,139.7 cw(c125.432,140.545) KIPAS.2@124.834,139.947 ; UV-TR1.2@124.968,113.761 ccw(c124.968,115.526) 126.216,114.278 ; INT1.2@124.968,122.809 127.889,122.809 ; INT1.2@125.215,122.562 cw(c125.813,121.964) 125.813,122.809 cw(c125.813,123.654) INT1.2@125.215,123.056 ; 125.85,113.997 UV-TR1.2@124.968,113.411 ; PC1.1@127.019,47.879 ccw(c124.919,47.879) 126.404,49.364 ccw(c127.889,50.849) PC1.1@127.889,48.749 ; PC1.1@127.207,47.339 125.222,50.546 ; 127.576,115.638 UV-TR1.2@124.968,113.411 ; v1(127.889,102.743) 127.889,97.409 ; 127.889,122.682 127.889,115.951 ; 127.982,115.858 UV-TR.2@130.429,113.411 127.889,115.951 ; PC1.1@128.429,48.561 125.222,50.546 ; 129.144,96.154 cw(c128.113,95.123) MODE.2@129.571,95.123 ; PROX1.2@129.801,85.732 ccw(c129.203,85.134) 129.203,85.979 ccw(c129.203,86.824) PROX1.2@129.801,86.226 ; UV-TR.2@130.079,113.411 ccw(c129.234,113.411) 129.832,114.008 ccw(c130.429,114.606) UV-TR.2@130.429,113.761 ; MODE.2@130.168,94.876 cw(c130.766,94.278) 130.766,95.123 cw(c130.766,95.968) MODE.2@130.168,95.37 ; PROX1.2@130.295,85.732 cw(c130.893,85.134) 130.893,85.979 cw(c130.893,86.824) PROX1.2@130.295,86.226 ; INT2.2@130.309,122.562 ccw(c129.711,121.964) 129.711,122.809 ccw(c129.711,123.654) INT2.2@130.309,123.056 ; 130.318,139.7 GET_FIRE.1@133.477,139.573 132.656,139.656 ; INT2.2@130.556,122.809 127.889,122.809 ; 132.325,139.7 cw(c132.325,138.421) GET_FIRE.1@133.23,139.326 ; GET_FIRE.1@133.35,139.7 129.159,139.7 ; 146.155,81.026 KANAN2.4@149.305,81.026 ; KANAN2.3@151.598,80.779 ccw(c151,80.181) 151,81.026 ccw(c151,81.871) KANAN2.3@151.598,81.273 ; KANAN2.3@151.845,81.026 KANAN2.4@149.305,81.026 ; 107.667,49.436 PC3.1@107.738,47.879 ; PC3.1@107.738,47.879 107.81,49.436 ; PC3.1@107.738,47.879 110.278,50.419 115.274,50.419 ; PC3.1@107.738,47.879 107.738,59.814 ; 115.274,50.419 PC2.1@117.814,47.879 ; 115.274,50.419 PC2.1@117.814,47.879 ; PC2.1@117.814,47.879 117.814,49.234 ; PC2.1@117.814,47.879 119.126,50.546 ; PC2.1@117.814,47.879 118.506,49.328 ; 117.814,49.234 119.126,50.546 ; 119.126,50.546 125.222,50.546 ; UV-TR1.2@124.968,113.411 125.349,113.411 127.889,115.951 ; 125.222,50.546 PC1.1@127.889,47.879 125.222,50.546 ; 127.889,97.409 MODE.2@129.921,95.123 ; 127.889,97.409 129.921,95.377 MODE.2@129.921,95.123 ; 127.889,122.809 127.889,138.43 129.159,139.7 ; MODE.2@129.921,95.123 131.572,95.123 134.747,91.948 134.747,85.979 ; 134.747,85.979 139.7,81.026 KANAN.4@142.35,81.026 KANAN.3@144.89,81.026 KANAN2.4@149.305,81.026
pads on no net: LCD.6 PIXY.2 PIXY.6 PIXY.8

## Polygon pours and split planes (outlines as drawn)
no net on Bottom Layer "Bottom Layer-No Net" (solid, pour order 4): 80.109,147 156,147 156,40 80,40 80,147
no net on Top Layer "Bottom Layer-No Net" (solid, pour order 6): 80.109,147 156,147 156,40 80.523,40 80.391,40.132 80,40.523 80,147

## Keep-outs
Keep-Out Layer:
  lines w0.254: 80,147 80,40 156,40 156,147 80.109,147

## Silkscreen, mask and mechanical layers (free items; w line width, h text height)
Top Overlay:
  text "GND" at -29.337,148.082 h0.7
  text "GND" at -29.337,145.542 h0.7
  text "A14" at 124.968,144.145 h0.8 r90
  text "B11" at 108.966,143.383 h0.8 r90
  text "GND" at -29.337,142.875 h0.7
  text "B11" at 103.505,142.367 h0.8 r90
  text "GND" at -29.464,140.335 h0.7
  text "B10" at 108.966,140.208 h0.8 r90
  text "GND" at 96.012,139.065 h0.7
  text "GND" at 138.049,139.065 h0.7
  text "GND" at 153.67,139.065 h0.7
  text "GND" at 80.518,138.938 h0.7
  text "B10" at 103.505,138.938 h0.8 r90
  text "GND" at -29.464,137.795 h0.7
  text "C6" at 138.049,136.652 h0.7
  text "C7" at 153.67,136.525 h0.7
  text "D15" at 80.518,136.398 h0.7
  text "NC" at 96.012,136.398 h0.7
  text "GND" at -29.718,135.255 h0.7
  text "A13" at 132.334,134.493 h0.8
  text "D14" at 96.012,133.858 h0.7
  text "C8" at 138.049,133.858 h0.7
  text "C9" at 153.67,133.858 h0.7
  text "D13" at 80.518,133.731 h0.7
  text "GND" at -29.718,132.969 h0.7
  text "D12" at 96.012,131.445 h0.7
  text "A8" at 138.049,131.445 h0.7
  text "A9" at 153.67,131.445 h0.7
  text "D11" at 80.518,131.191 h0.7
  text "GND" at -29.718,130.429 h0.7
  text "D9" at 101.219,129.032 h0.8
  text "A10" at 138.049,129.032 h0.7
  text "A13" at 153.67,128.905 h0.7
  text "D9" at 80.518,128.651 h0.7
  text "D10" at 96.012,128.651 h0.7
  text "GND" at -29.591,127.635 h0.7
  text "D0" at 124.333,127.381 h0.8
  text "D1" at 130.302,127.381 h0.8
  text "D8" at 101.219,126.619 h0.8
  text "A14" at 138.049,126.492 h0.7
  text "A15" at 153.67,126.365 h0.7
  text "D8" at 96.012,126.238 h0.7
  text "B15" at 80.518,126.111 h0.7
  text "GND" at -29.718,125.349 h0.7
  text "C11" at 153.67,124.079 h0.7
  text "C10" at 138.049,123.952 h0.7
  text "B13" at 80.518,123.825 h0.7
  text "B14" at 96.012,123.698 h0.7
  text "GND" at -29.718,122.682 h0.7
  text "C12" at 138.049,121.412 h0.7
  text "D0" at 153.67,121.412 h0.7
  text "B11" at 80.518,121.285 h0.7
  text "B12" at 96.012,121.158 h0.7
  text "GND" at -29.718,120.142 h0.7
  text "D2" at 153.67,118.872 h0.7
  text "D1" at 138.049,118.745 h0.7
  text "B10" at 96.012,118.618 h0.7
  text "E15" at 80.518,118.491 h0.7
  text "GND" at -29.718,117.729 h0.7
  text "D2" at 124.587,117.729 h0.8
  text "D3" at 129.794,117.729 h0.8
  text "D3" at 138.049,116.332 h0.7
  text "D4" at 153.67,116.332 h0.7
  text "E13" at 80.518,116.205 h0.7
  text "E14" at 96.012,115.951 h0.7
  text "GND" at -29.718,115.062 h0.7
  text "D6" at 153.67,113.792 h0.7
  text "D5" at 138.049,113.665 h0.7
  text "E11" at 80.518,113.538 h0.7
  text "E12" at 96.012,113.538 h0.7
  text "GND" at -29.718,112.522 h0.7
  text "B3" at 153.67,111.252 h0.7
  text "E10" at 96.012,111.125 h0.7
  text "D7" at 138.049,111.125 h0.7
  text "E9" at 80.518,110.998 h0.7
  text "GND" at -29.464,110.109 h0.7
  text "B4" at 138.049,108.712 h0.7
  text "B5" at 153.67,108.712 h0.7
  text "E7" at 80.518,108.585 h0.7
  text "E8" at 96.012,108.585 h0.7
  text "GND" at -29.464,107.061 h0.7
  text "B6" at 138.049,106.172 h0.7
  text "B7" at 153.67,106.045 h0.7
  text "GND" at 80.518,105.918 h0.7
  text "B2" at 96.012,105.791 h0.7
  text "GND" at -29.464,104.902 h0.7
  text "VDD" at 153.67,103.632 h0.7
  text "BOOT" at 138.049,103.505 h0.7
  text "B1" at 80.518,103.378 h0.7
  text "B0" at 96.012,103.251 h0.7
  text "GND" at -29.464,102.362 h0.7
  text "B9" at 153.67,101.219 h0.7
  text "B8" at 138.049,100.965 h0.7
  text "C5" at 80.518,100.711 h0.7
  text "C4" at 96.012,100.584 h0.7
  text "GND" at -29.337,99.568 h0.7
  text "E0" at 138.049,98.425 h0.7
  text "E1" at 153.67,98.425 h0.7
  text "A7" at 80.518,98.171 h0.7
  text "A6" at 96.012,98.171 h0.7
  text "GND" at -29.337,96.647 h0.7
  text "E2" at 138.049,95.885 h0.7
  text "E3" at 153.67,95.885 h0.7
  text "A5" at 80.518,95.758 h0.7
  text "A4" at 96.012,95.758 h0.7
  text "GND" at -29.337,94.234 h0.7
  text "E4" at 138.049,93.218 h0.7
  text "E5" at 153.67,93.218 h0.7
  text "A3" at 80.518,93.091 h0.7
  text "A2" at 96.012,93.091 h0.7
  text "GND" at -29.464,92.075 h0.7
  text "E6" at 138.049,90.805 h0.7
  text "C13" at 153.67,90.805 h0.7
  text "A0" at 96.012,90.678 h0.7
  text "E9" at 107.188,90.551 h0.8 r90
  text "A1" at 80.518,90.424 h0.7
  text "E7" at 118.364,90.424 h0.8 r90
  text "E8" at 113.03,90.297 h0.8 r90
  text "E6" at 124.333,90.17 h0.8 r90
  text "E5" at 132.715,89.789 h0.8 r90
  text "GND" at -29.337,89.662 h0.7
  text "C15" at 153.67,88.519 h0.7
  text "C14" at 138.049,88.265 h0.7
  text "C3" at 80.518,88.011 h0.7
  text "C2" at 96.012,88.011 h0.7
  text "GND" at -29.337,86.868 h0.7
  text "H1" at 153.67,85.979 h0.7
  text "H0" at 138.049,85.852 h0.7
  text "C1" at 80.518,85.471 h0.7
  text "C0" at 96.012,85.344 h0.7
  text "3.3" at 138.049,83.185 h0.7
  text "3.3V" at 153.67,83.185 h0.7
  text "GND" at 80.518,83.058 h0.7
  text "RST" at 96.012,83.058 h0.7
  text "GND" at 105.156,81.915 h0.8 r90
  text "VCC" at 138.049,80.772 h0.7
  text "VCC" at 153.67,80.518 h0.7
  text "VDD" at 80.518,80.391 h0.7
  text "VDD" at 96.012,80.391 h0.7
  text "C14" at 128.397,79.756 h0.8
  text "Rx" at 115.443,78.613 h1 r90
  text "A3" at 110.871,78.359 h0.8 r90
  text "C13" at 117.221,78.359 h0.8 r90
  text "GND" at 153.67,78.232 h0.7
  text "GND" at 138.049,78.105 h0.7
  text "GND" at 80.518,77.851 h0.7
  text "GND" at 96.012,77.851 h0.7
  text "Rev by Wernbeck, iPunk" at 153.416,75.565 h1.3 r270
  text "ROBUSTA 2.0" at 149.987,70.866 h2 r270
  text "+" at 141.097,44.196 h1.52
  text "VCC" at 104.394,40.64 h1.52
  text "GND" at 109.855,40.64 h1.52
  text "VCC" at 115.316,40.64 h1.52
  text "GND" at 120.777,40.64 h1.52
  text "VCC" at 126.238,40.64 h1.52
  text "GND" at 131.699,40.64 h1.52
  text "VCC" at 85.979,40.513 h1.52
  text "GND" at 91.44,40.513 h1.52

## Dimensions
156.083,147.193 to 156,40 on Top Overlay
80,40 to 80.109,147 on Top Overlay
80.109,147 to 156,147 on Top Overlay
83,43 to 80,40 on Top Overlay
83,43 to 80,40 on Top Overlay
156,147 to 144.89,139.446 on Top Overlay
144.89,139.446 to 91.41,139.197 on Mechanical 1

## Text inside footprints (layer, text, board x,y; h text height)
JP1: Top Overlay "4" at 108.331,104.394 h1 r180; Top Overlay "3" at 108.331,101.727 h1 r180; Top Overlay "1" at 108.077,96.52 h1 r180; Top Overlay "2" at 108.331,99.06 h1 r180
KANAN: Top Overlay "2" at 142.858,75.946 h1.27 r90; Top Overlay "1" at 145.398,75.946 h1.27 r90; Top Overlay "49" at 145.398,141.478 h1.27 r90; Top Overlay "50" at 142.858,141.478 h1.27 r90
KANAN2: Top Overlay "2" at 149.813,75.946 h1.27 r90; Top Overlay "1" at 152.353,75.946 h1.27 r90; Top Overlay "49" at 152.353,141.478 h1.27 r90; Top Overlay "50" at 149.813,141.478 h1.27 r90
KIRI: Top Overlay "2" at 84.963,75.692 h1.27 r90; Top Overlay "1" at 87.503,75.692 h1.27 r90; Top Overlay "49" at 87.503,141.224 h1.27 r90; Top Overlay "50" at 84.963,141.224 h1.27 r90
KIRI2: Top Overlay "2" at 91.918,75.697 h1.27 r90; Top Overlay "1" at 94.458,75.697 h1.27 r90; Top Overlay "49" at 94.458,141.229 h1.27 r90; Top Overlay "50" at 91.918,141.229 h1.27 r90
LCD: Top Overlay "10" at 100.076,118.364 h1.27 r90; Top Overlay "9" at 102.616,118.364 h1.27 r90; Top Overlay "1" at 102.616,104.648 h1.27 r90; Top Overlay "2" at 100.076,104.14 h1.27 r90
PIXY: Top Overlay "10" at 112.141,110.617 h1.27 r270; Top Overlay "9" at 109.601,110.617 h1.27 r270; Top Overlay "1" at 109.601,124.333 h1.27 r270; Top Overlay "2" at 112.141,124.841 h1.27 r270